# Altium PCB CreationByte_DevBoard_v1 PCB.PcbDoc (part 2 of 2)
Units mil, origin at the board's own origin, x right, y up, seen from the top; angles counter-clockwise.
Board outline 2480.32 x 787.4 mil, 2 copper layers (Top Layer, Bottom Layer), stack 38.583 mil thick; 69 components, 43 nets, 237 pads, 167 vias.
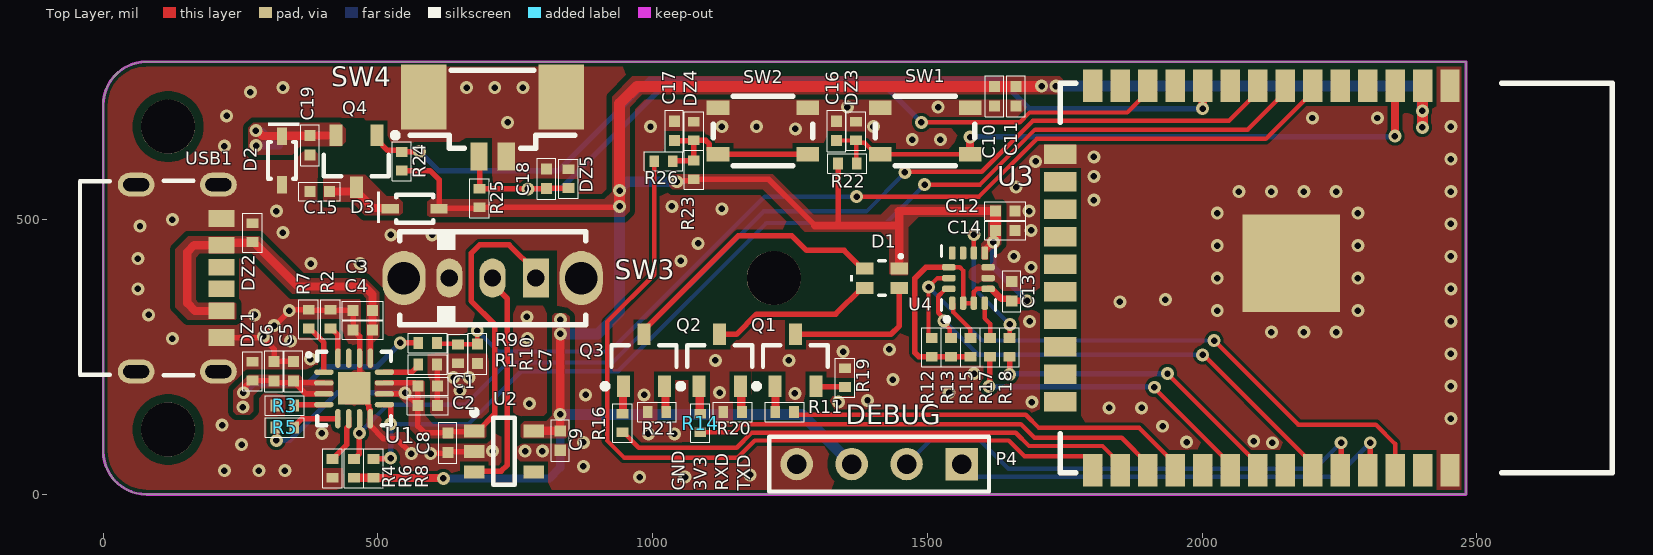
[diagram p0: Top Layer view]

## Part data (continued)
R26: library part RES_SMD, "RES SMD 33 OHM 1% 1/16W 0402", Case Code (Imperial)=0402, Case Code (Metric)=1005, Manufacturer 1=Yageo, Manufacturer Part Number 1=RC0402FR-0733RL, Max Operating Temperature=155°C, Max Power Dissipation=63mW, Min Operating Temperature=-55°C, Package Quantity=10000, Power Rating=62.5mW, Resistance Tolerance=1%, Resistor Type="Thick Film", Supplier Part Number 1=311-33.0LRCT-ND, Temperature Coefficient=100ppm/°C, Voltage Rating=50V, Case/Package=0402, Category="Chip SMD Resistors", ComponentLink1Description=https://datasheet.ciiva.com/11819/0900766b80c66297-11819487.pdf?src-supplier=RSComponents, ComponentLink1URL=https://datasheet.ciiva.com/11819/0900766b80c66297-11819487.pdf?src-supplier=RSComponents, ComponentLink2Description=https://datasheet.ciiva.com/15189/getdatasheetpartid-329253-15189431.pdf?src-supplier=Verical, ComponentLink2URL=https://datasheet.ciiva.com/15189/getdatasheetpartid-329253-15189431.pdf?src-supplier=Verical, ComponentLink3Description=https://datasheet.ciiva.com/24070/pyu-rc0402-51-rohs-l-6-r-8721-24070077.pdf?src-supplier=Mouser, ComponentLink3URL=https://datasheet.ciiva.com/24070/pyu-rc0402-51-rohs-l-6-r-8721-24070077.pdf?src-supplier=Mouser, ComponentLink4Description=https://datasheet.ciiva.com/7849/1018594-7849966.pdf?src-supplier=Element14, ComponentLink4URL=https://datasheet.ciiva.com/7849/1018594-7849966.pdf?src-supplier=Element14, ComponentLink5Description=https://datasheet.ciiva.com/7849/1018594-7849967.pdf?src-supplier=Element14, ComponentLink5URL=https://datasheet.ciiva.com/7849/1018594-7849967.pdf?src-supplier=Element14, ComponentLink6Description=https://datasheet.ciiva.com/17070/pyu-rc0402-51-rohs-l-6-r-17070335.pdf?src-supplier=Future+Electronics, ComponentLink6URL=https://datasheet.ciiva.com/17070/pyu-rc0402-51-rohs-l-6-r-17070335.pdf?src-supplier=Future+Electronics, Construction=Rectangular, Depth=0.5mm, Features="Moisture Resistant", Height=0.35mm, Lead Free="Lead Free", Length=1mm, Military Standard=Not, Mouting Technology=SMT, Number of Pins=2, Number of Terminations=2, Packaging="Tape and Reel", Pin=2, Pricing 1="1=0.10000, 10=0.01600, 100=0.00660, 1000=0.00299, 2500=0.00259, 5000=0.00214 (USD)", REACH SVHC=Unknown, Resistance=33R, RoHS=Yes, RoHS Compliant=Yes, Series=RC, Size Code=0402, Stock 1=1820701, Supplier 1=Digi-Key, Technology="THICK FILM", Termination=SMD/SMT, Tolerance=1%, Voltage Rating (DC)=50V, Width=0.5mm
SW1 SW2: library part A08-0790, "SWITCH TACTILE SPST-NO 0.05A 16V", Contact Rating @ Voltage="0.05A @ 16VDC", Illumination Type, Color=-, Manufacturer=C&K, Manufacturer Part Number="PTS810 SJK 250 SMTR LFS", Operating Force=260gf, Operating Temperature="-40°C ~ 85°C", Supplier Part Number 1=CKN10503CT-ND, Actuator Height off PCB, Vertical=2.50mm, Actuator Length, Right Angle=-, Actuator Material=-, Actuator Orientation="Top Actuated", Actuator Type=Standard, Category=Switches, Circuit=SPST-NO, ComponentLink1Description=https://www.ckswitches.com/media/1476/pts810.pdf, ComponentLink1URL=https://www.ckswitches.com/media/1476/pts810.pdf, Features=-, Illumination=Non-Illuminated, Illumination Voltage (Nominal)=-, Ingress Protection=-, Mechanical Life="50,000 Cycles", Mounting Type="Surface Mount", Outline="4.20mm x 3.20mm", Packaging="Cut Tape (CT)", Part Status=Active, Pricing 1="1=0.3, 10=0.287, 25=0.2768, 50=0.267, 100=0.2521, 250=0.23728, 500=0.2274, 1000=0.17302 (USD)", RoHS="RoHS Compliant", Stock 1=75516, Supplier 1=Digi-Key, Switch Function=Off-Mom, Switch Travel=0.15mm, Termination Style="J Lead"
SW3: library part JS202011JAQN, "Slide", Actuator Color=Black, Contact Current Rating=100mA, Contact Resistance=20mR, Insulation Resistance=100MR, Manufacturer 1="ITT C&K", Max Operating Temperature=70°C, Max Voltage Rating (DC)=12V, Min Operating Temperature=-30°C, Package Quantity=300, Supplier Part Number 1=CKN9565-ND, Actuator Length=4mm, Actuator Material=Polyoxymethylene,Acetal,Polyacetal, Actuator Type=Standard, Category="Slide Switches", ComponentLink1Description=https://datasheet.ciiva.com/30466/0900766b81263f61-30466806.pdf?src-supplier=RSComponents, ComponentLink1URL=https://datasheet.ciiva.com/30466/0900766b81263f61-30466806.pdf?src-supplier=RSComponents, ComponentLink2Description=https://datasheet.ciiva.com/16298/os102011ms2qn1-16298526.pdf?src-supplier=Future+Electronics, ComponentLink2URL=https://datasheet.ciiva.com/16298/os102011ms2qn1-16298526.pdf?src-supplier=Future+Electronics, ComponentLink3Description=https://datasheet.ciiva.com/2889/os-19jan15-2889173.pdf?src-supplier=Digi-Key, ComponentLink3URL=https://datasheet.ciiva.com/2889/os-19jan15-2889173.pdf?src-supplier=Digi-Key, ComponentLink4Description=https://datasheet.ciiva.com/1699/os-19jan15-1699479.pdf?src-supplier=Newark, ComponentLink4URL=https://datasheet.ciiva.com/1699/os-19jan15-1699479.pdf?src-supplier=Newark, ComponentLink5Description=https://datasheet.ciiva.com/18147/getdatasheetpartid-320490-18147210.pdf?src-supplier=Verical, ComponentLink5URL=https://datasheet.ciiva.com/18147/getdatasheetpartid-320490-18147210.pdf?src-supplier=Verical, ComponentLink6Description=https://datasheet.ciiva.com/16997/70128245-16997771.pdf?src-supplier=Allied+Electronics, ComponentLink6URL=https://datasheet.ciiva.com/16997/70128245-16997771.pdf?src-supplier=Allied+Electronics, ComponentLink7Description=https://datasheet.ciiva.com/26290/os-11mar13-26290652.pdf?src-supplier=Onlinecomponents.com, ComponentLink7URL=https://datasheet.ciiva.com/26290/os-11mar13-26290652.pdf?src-supplier=Onlinecomponents.com, ComponentLink8Description=https://datasheet.ciiva.com/1532/1683358-1532308.pdf?src-supplier=Element14, ComponentLink8URL=https://datasheet.ciiva.com/1532/1683358-1532308.pdf?src-supplier=Element14, Contact Material="Copper Alloy,Brass,Silver", Contact Plating=Silver,Gold, Contact Style=Non-Shorting, Current Rating=100mA, Depth=4.3mm, Electrical Life=10000Cycles, Housing Material=Resin, Lead Free="Lead Free", Length=8.6mm, Manufacturer Part Number 1=OS102011MS2QN1, Max Current Rating=100mA, Mechanical Life=10000Cycles, Mount="Through Hole,PCB", Orientation=Vertical, Packaging=Bulk, Pricing 1="1=0.51000, 10=0.49300, 25=0.47520, 100=0.41110, 250=0.37452, 500=0.34712, 1000=0.31059, 2500=0.29415, 5000=0.27222 (USD)", Radiation Hardening=No, REACH SVHC="No SVHC", RoHS=Yes, RoHS Compliant=Yes, Series=OS, Stock 1=34195, Supplier 1=Digi-Key, Switch Function=On-On, Switch Travel=2mm, Termination="PC Pins", Throw Configuration=SPDT, Voltage Rating (DC)=12V
U1: "IC BATT CHG LI-ION 1CELL 16QFN", Battery Pack Voltage=4.2V, Case/Package=VQFN, Manufacturer 1="Texas Instruments", Max Charge Current=1.5A, Max Operating Temperature=125°C, Max Supply Voltage=10.2V, Min Input Voltage=4.3V, Min Operating Temperature=-40°C, Min Supply Voltage=4.35V, Package Quantity=3000, Supplier Part Number 1=595-BQ24074RGTR, Battery Chemistry=LITHIUM-ION, Category="Battery Management", ComponentLink1Description=https://datasheet.ciiva.com/1932/bq24074-1932360.pdf?src-supplier=Digi-Key, ComponentLink1URL=https://datasheet.ciiva.com/1932/bq24074-1932360.pdf?src-supplier=Digi-Key, ComponentLink2Description=https://datasheet.ciiva.com/26811/getdatasheetpartid-357714-26811766.pdf?src-supplier=Verical, ComponentLink2URL=https://datasheet.ciiva.com/26811/getdatasheetpartid-357714-26811766.pdf?src-supplier=Verical, ComponentLink3Description=https://datasheet.ciiva.com/3214/bq24079-3214039.pdf?src-supplier=Avnet, ComponentLink3URL=https://datasheet.ciiva.com/3214/bq24079-3214039.pdf?src-supplier=Avnet, ComponentLink4Description=https://datasheet.ciiva.com/26109/bq24079-26109321.pdf?src-supplier=Avnet+Europe, ComponentLink4URL=https://datasheet.ciiva.com/26109/bq24079-26109321.pdf?src-supplier=Avnet+Europe, Contact Plating=Gold, Fault Protection="Over Voltage,Over Temperature,Short Circuit,Reverse Current", Interface=USB, Lead Free="Lead Free", Manufacturer Part Number 1=BQ24074RGTR, Number of Cells=1, Number of Pins=16, Output Current=1.5A, Output Voltage=4.2V, Packaging="Tape and Reel", Pricing 1="1=2.29000, 10=2.07000, 50=1.95000, 100=1.66000, 1000=1.13000, 10000=1.06000 (USD)", Radiation Hardening=No, RoHS=Yes, RoHS Compliant=Yes, Series=-, Stock 1=15, Supplier 1=Mouser, Weight=0.000808oz
U2: "IC REG LINEAR 3.3V 1A SOT25", Case/Package=SOT-25, Dropout Voltage=655mV, Manufacturer=Torex, Max Input Voltage=6V, Max Operating Temperature=85°C, Min Current Limit=1.005A, Min Input Voltage=1.6V, Min Operating Temperature=-40°C, Nominal Output Voltage=3.3V, Output Current=1A, Package Quantity=1, Supplier Part Number 1=893-1133-1-ND, ComponentLink1Description=https://datasheet.ciiva.com/2040/xc6220-2040200.pdf?src-supplier=Digi-Key, ComponentLink1URL=https://datasheet.ciiva.com/2040/xc6220-2040200.pdf?src-supplier=Digi-Key, ComponentLink2Description=https://datasheet.ciiva.com/2040/xc6220-2040201.pdf?src-supplier=Digi-Key, ComponentLink2URL=https://datasheet.ciiva.com/2040/xc6220-2040201.pdf?src-supplier=Digi-Key, ComponentLink3Description=https://datasheet.ciiva.com/2040/xc6220-2040202.pdf?src-supplier=Digi-Key, ComponentLink3URL=https://datasheet.ciiva.com/2040/xc6220-2040202.pdf?src-supplier=Digi-Key, ComponentLink4Description=https://datasheet.ciiva.com/7992/610888-7992813.pdf?src-supplier=Element14, ComponentLink4URL=https://datasheet.ciiva.com/7992/610888-7992813.pdf?src-supplier=Element14, ComponentLink5Description=https://datasheet.ciiva.com/5755/610888-5755886.pdf?src-supplier=Farnell, ComponentLink5URL=https://datasheet.ciiva.com/5755/610888-5755886.pdf?src-supplier=Farnell, Manufacturer Part Number=XC6220B331MR-G, Mount="Surface Mount", Number of Pins=5, Number of Regulators=1, Output Type=Fixed, Output Voltage=3.3V, Packaging="Tape and Reel", Pricing 1="1 = 0.91000, 10 = 0.81100, 25 = 0.77000, 100 = 0.59130, 250 = 0.52252, 500 = 0.49500, 1000 = 0.38500 (USD)", REACH SVHC="No SVHC", RoHS=Yes, Stock 1=13360, Supplier 1=Digi-Key
U3: library part ESP32-S, "RX TXRX MOD WIFI TRACE ANT SMD", Case/Package=SMD/SMT, Frequency=2.5GHz, Manufacturer="Espressif Systems", Max Operating Temperature=85°C, Min Operating Temperature=-40°C, Supplier Part Number 1=1904-1025-1-ND, ComponentLink1Description=https://www.espressif.com/sites/default/files/documentation/esp32-wroom-32d_esp32-wroom-32u_datasheet_en.pdf?src-supplier=Digi-Key, ComponentLink1URL=https://www.espressif.com/sites/default/files/documentation/esp32-wroom-32d_esp32-wroom-32u_datasheet_en.pdf?src-supplier=Digi-Key, Data Rate=150Mbps, Interface=I2C,SPI,GPIO,PWM,SDIO,UART, Manufacturer Part Number="ESP32-WROOM-32D (16MB)", Memory Size=536KB, Mount="Surface Mount", Packaging="Tape and Reel", Pricing 1="1 = 4.50000 (USD)", RoHS=No, Sensitivity=-98dBm, Stock 1=6133, Supplier 1=Digi-Key
U4: "IMU ACCEL/GYRO I2C/SPI 14LGA", Case/Package=LGA, Manufacturer 1=STMicroelectronics, Manufacturer Part Number 1=LSM6DSLTR, Max Operating Temperature=85°C, Min Operating Temperature=-40°C, Supplier Part Number 1=497-16705-1-ND, Category="Inertial Measurement Units (IMUs)", ComponentLink1Description=http://www.farnell.com/datasheets/2290668.pdf?src-supplier=Farnell, ComponentLink1URL=http://www.farnell.com/datasheets/2290668.pdf?src-supplier=Farnell, ComponentLink2Description=https://www.mouser.com/ds/2/389/lsm6dsl-973708.pdf?src-supplier=Mouser, ComponentLink2URL=https://www.mouser.com/ds/2/389/lsm6dsl-973708.pdf?src-supplier=Mouser, ComponentLink3Description=http://www.st.com/content/ccc/resource/technical/document/datasheet/ee/23/a0/dc/1d/68/45/52/DM00237456.pdf/files/DM00237456.pdf/jcr:content/translations/en.DM00237456.pdf?src-supplier=Digi-Key, ComponentLink3URL=http://www.st.com/content/ccc/resource/technical/document/datasheet/ee/23/a0/dc/1d/68/45/52/DM00237456.pdf/files/DM00237456.pdf/jcr:content/translations/en.DM00237456.pdf?src-supplier=Digi-Key, ComponentLink4Description=http://www.farnell.com/datasheets/2290668.pdf?src-supplier=Newark, ComponentLink4URL=http://www.farnell.com/datasheets/2290668.pdf?src-supplier=Newark, ComponentLink5Description=http://www.farnell.com/datasheets/2290668.pdf?src-supplier=Element14, ComponentLink5URL=http://www.farnell.com/datasheets/2290668.pdf?src-supplier=Element14, Mount="Surface Mount", Output Type=SPI,I2C, Packaging="Tape and Reel", Pricing 1="1=5.27000, 10=4.73000, 25=4.47200, 100=3.87560, 250=3.67688, 500=3.29924, 1000=3.28125 (USD)", RoHS=Yes, RoHS Compliant=Yes, Sensor Type="Accelerometer,Gyroscope,3 Axis,Temperature", Supplier 1=Digi-Key
USB1: "USB - Type C Female 6 USB Connectors RoHS", Manufacturer 1="Korean Hroparts Elec", Manufacturer Part Number 1=TYPE-C-31-M-17

## Free pads (board coordinates)
  round 98.43 hole 98.43: M1(118.11,669.29) M1(1220.47,393.7) M2(118.11,118.11)

## Via types
v1: diameter 23.62, hole 11.81, Top Layer to Bottom Layer, tented both sides, 167 vias

## Nets (pads, with @x,y where several pads share a name; then routed paths per layer and width w, separated by ;. In a path a pad name is that pad's centre, name@x,y a point inside that pad or via, vN(x,y) a via of type N, cw(c..) or ccw(c..) an arc to the next point about the centre after c; other vN are vias at no path point)
+3.3V: C9.2 C10.2 C11.2 C12.2 C13.2 C14.2 D1.1 D3.1 P4.3 R6.1 R8.1 R12.2 R13.2 R15.2 R22.2 R23.2 R24.2 R25.2 U2.5 U3.2 U4.2 U4.3 U4.5 U4.8 U4.12 | length 5585.4
  Top Layer w8: U4.12 1559.11,413.39 1564.96,407.54 U4.2 U4.3 1584.64,368.93 1589.73,374.02 U4.5
  Top Layer w10: R24.2 594.7,589.3 611.22,572.78 D3.1 612.56,521.03 683.7,521.03 R25.2 938.37,522.37 v1(940,524) ; v1(1044,569) 1046.28,571.28 1072.53,571.28 R23.2 1211.17,573.55 1275.59,509.13 1295.28,489.44 ; 1337.33,491 R22.2 ; U4.12 1497.1,413.39 1477,393.29 1477,258 1484.28,250.72 R12.2 R13.2 R15.2
  Top Layer w12: U4.8 1604.33,445.29 v1@1619.02,459.98 ; U4.5 1616.54,374.02 1634.16,356.4 1649.5,356.4 C13.2 v1(1681.64,352.36) ; v1@1619.98,460.94 1619.98,476.28 C14.2@1623.98,480.28
  Top Layer w15: R6.1 R8.1 492.75,29.62 618.38,29.62 v1(619,29) ; U2.5 C9.2 831.75,115.82 831.75,145.63 v1(831.69,145.69) ; v1@831.84,145.6 831.84,291.84 v1(832,292) ; 1295.28,489.44 1445.38,489.44 1448.82,486 ; D1.1 1448.82,486 ; C12.2 1447.65,515.75 1448.82,514.57 1448.82,486
  Top Layer w20: v1(940,524) v1(940,553) 940,711 971.13,742.13 C10.2 C11.2 1706.15,742.13 1707.02,743 v1(1708,743) ; v1(1620,459) 1620,459.98 1623.98,463.96 C14.2@1623.98,480.28 ; C12.2 C14.2 ; v1(2401,668) v1(2401,698) 2401.09,698.09 2401.09,743.82 2401,743.91 U3.2 ; C14.2@1623.98,480.28 C14.2
  Bottom Layer w12: v1(1620,459) 1620,414 v1(1681.64,352.36)
  Bottom Layer w15: v1(619,29) 812,29 831.69,48.69 v1(831.69,145.69)
  Bottom Layer w20: v1(831.69,145.69) 1271.63,145.69 P4.3 ; v1(832,292) 900,292 940,332 940,553.98 941.81,555.79 941.81,557.28 953.53,569 v1(1044,569) ; v1(1708,743) v1(1734,743) 2388.59,743 2400.31,731.28 2400.31,698.69 v1(2401,698)
  other v1: 832,318
+5V: C3.2 C4.2 DZ2.2 U1.13 USB1.A9 USB1.B9 | length 663.2
  Top Layer w10: U1.13 486.3,248.11 486.3,295.35 C4.2
  Top Layer w15: USB1.A9 167.14,333.86 153,348 153,441 165.54,453.54 USB1.B9 220.03,458.02 270.3,458.02 DZ2.2 273.62,459.38 354.5,378.5 475.5,378.5 490.16,363.84 C4.2
ACC_INT1: R17.1 U3.30 | length 565.6
  Top Layer w8: v1(1913,195) 1913,193.69 2051.18,55.51 U3.30
  Top Layer w10: v1(1612,196) 1613.09,197.09 1613.09,249.63 R17.1
  Bottom Layer w10: v1(1612,196) 1612.5,195.5 1912.5,195.5 v1(1913,195)
ACC_INT2: R18.1 U3.31 | length 564.4
  Top Layer w8: v1(1937,220) 1937,219.69 2101.18,55.51 U3.31
  Top Layer w10: v1(1649.61,218.61) R18.1
  Bottom Layer w10: v1(1649.61,218.61) 1650.3,219.3 1936.3,219.3 v1(1937,220)
ADC_VBAT: C7.2 R9.1 R10.2 U3.6 | length 1843.3
  Top Layer w8: R9.1 608.89,274.25 644.33,274.25 R10.2 646.03,273.26 680.74,273.26 680.92,273.44 680.92,298.08 v1(680.74,298.26) ; v1(1371,542) 1594,542 1699,647 2115.9,647 2201.18,732.28 U3.6
  Bottom Layer w8: v1(680.74,298.26) 719,260 922,260 1204,542 v1(1371,542)
CHARGE_PGOOD: R6.2 U1.7 U3.8 | length 1956.9
  Top Layer w8: v1(1459,586) 1460,587 1599,587 1692,680 2048.9,680 2101.18,732.28 U3.8
  Top Layer w10: R6.2 458.66,64.24 462.52,68.1 462.52,70.48 466,73.96 v1(466,111.32)
  Bottom Layer w8: v1(466,111.32) 517.54,162.86 658.86,162.86 736,240 927,240 1202,515 1389,515 1459,585 v1(1459,586)
CHARGE_STAT: R8.2 U1.9 U3.7 | length 2030.4
  Top Layer w8: v1(1495,563.81) 1595.81,563.81 1696,664 2082.9,664 2151.18,732.28 U3.7
  Top Layer w10: R8.2 493,65.12 522.12,65.12 v1(523,66) ; U1.9 522.92,163.39 523,163.31 v1(523,128)
  Bottom Layer w8: v1(523,128) 665,128 761,224 937,224 1207,494 1425.19,494 v1(1495,563.81)
  Bottom Layer w10: v1(523,66) v1(523,128)
ESP32_EN: C16.1 DZ3.2 R22.1 SW1.1 SW1.2 U3.3 | length 1193.8
  Top Layer w8: C16.1 1335,644.06 1369.72,644.06 DZ3.2 ; R22.1 1370.7,602.99 1370.7,643.79 DZ3.2 ; SW1.1 SW1.2 1406.5,619.09 1385.95,639.64 1374.86,639.64 DZ3.2
  Top Layer w15: SW1.1 v1(1577.76,650.24) ; v1(2351,652) 2351.09,652.09 2351.09,744 U3.3
  Bottom Layer w10: v1(1577.76,650.24) 1578.63,651.12 2350.12,651.12 v1(2351,652)
ESP32_IO0: R26.1 U3.25 | length 1483.1
  Top Layer w8: R26.1 1002.69,399.69 917,314 917,98 948,67 1154.8,67 1185.8,98 1648,98 1676.77,69.23 1787.46,69.23 1801.18,55.51 U3.25
ESP32_RXD0: P4.2 U3.34 | length 900.2
  Top Layer w10: U3.34 2253,45.52 v1(2253,94)
  Bottom Layer w8: P4.2 1505.09,98 1596,98 1647,47 2206,47 v1(2253,94)
ESP32_SCL: R12.1 U3.36 U4.13 | length 1154.7
  Top Layer w8: R12.1 1506.96,284.72 1502.1,289.57 v1(1502.1,377.39) 1518.41,393.7 U4.13 ; v1(2022,280) 2175,127 2316,127 2351.18,91.82 U3.36
  Bottom Layer w8: v1(1502.1,377.39) 1599.5,280 v1(2022,280)
ESP32_SDA: R13.1 U3.33 U4.14 | length 901.6
  Top Layer w8: U4.14 1537.07,372.11 1530.97,372.11 1519.65,360.8 1519.65,330.58 1530,320.23 v1(1530,316) 1530,311.77 1540.88,300.89 1540.88,287.14 R13.1 ; v1(2001,254) 2002.69,254 2201.18,55.51 U3.33
  Bottom Layer w8: v1(1530,316) 1592,254 v1(2001,254)
ESP32_TXD0: P4.1 U3.35 | length 833.9
  Top Layer w10: U3.35 2306,48.52 v1(2306,94)
  Bottom Layer w8: P4.1 1587.32,30 1587.32,31.59 1587.73,32 2244,32 v1(2306,94)
GND: C1.1 C2.1 C3.1 C4.1 C5.1 C6.1 C7.1 C8.1 C9.1 C10.1 C11.1 C12.1 C13.1 C14.1 C15.1 C16.2 C17.2 C18.2 C19.1 D2.1 DZ1.1 DZ2.1 DZ3.1 DZ4.1 DZ5.1 P1.0 P1.1 P4.4 P5.0 P5.1 R1.1 R2.1 R3.1 R4.1 R7.1 R10.1 R19.1 R20.1 R21.2 SW1.3 SW1.4 SW2.3 SW2.4 SW3.3 SW3.H1 SW3.H2 SW4.0 SW4.2 U1.8 U1.14 U1.17 U2.2 U3.0 U3.1 U3.15 U3.38 U4.6 U4.7 USB1.0 USB1.A12 USB1.B12 | length 823.1
  Top Layer w10: USB1.A12 v1@290.17,285.43 ; C5.1 C6.1 311.02,264.58 v1@290.17,285.43 ; U1.17 466.54,202.76 U1.14 466.54,287.4 C4.1 C3.1 454.1,335.27 374.64,335.27 R7.1 340.64,335.9 v1@290.17,285.43 ; U1.17@462.2,187.4 481.22,168.39 481.22,164.4 483.09,162.53 483.09,156.79 486.22,153.66 486.22,125.16 510.54,100.84 534.16,100.84 v1(561,74) ; v1(596,74) 597.19,75.19 625.89,75.19 628.07,77.37 674.33,77.37 U2.2 ; R1.1 607.91,235.86 607.91,197.21 C1.1 C2.1
  other v1: 976.38,31.5 1059.06,31.5 1177.17,35.43 220.47,43.31 283.46,43.31 330.71,43.31 874.02,51.18 708.66,78.74 767.72,78.74 799.21,78.74 251.97,90.55 874.02,94.49 2128,94 1972,95 2094,97 992.13,110.24 1039.37,110.24 398,111 1928,124 216.54,125.98 2452.76,137.8 1830.71,157.48 1889.76,157.48 775.59,165.35 1338,168 1690,168 1391,171 877.95,181.1 984.25,181.1 1259,184 1122.05,185.04 1539.37,185.04 649,189 2452.76,196.85 1437,209 637.8,212.6 665.35,212.6 1585,220 1114.17,244.09 1248.03,244.09 377,246 2452.76,255.91 1346.46,259.84 1431,264 341,279 125.98,283.46 772,284 291.34,287.4 2125.98,295.28 2185.04,295.28 2244.09,295.28 311.02,307.09 1686,315 2452.76,314.96 771,323 82.68,326.77 275.59,326.77 338.58,334.65 2027.56,334.65 2283.46,334.65 1850.39,350.39 1933.07,354.33 62.99,374.02 2452.76,374.02 2027.56,393.7 2283.46,393.7 1688.98,413.39 378,420 467,420 1051.18,425.2 62.99,429.13 1657.48,433.07 2452.76,433.07 2027.56,452.76 2283.46,452.76 1082.68,456.69 523.62,472.44 598.43,472.44 326.77,476.38 1688.98,480.32 66.93,488.19 2452.76,492.13 125.98,500 2027.56,511.81 2283.46,511.81 314.96,515.75 1685.04,515.75 1125.98,519.68 1035,524 1803.15,535.43 2066.93,551.18 2125.98,551.18 2185.04,551.18 2244.09,551.18 2452.76,551.18 1661.42,559.06 1803.15,578.74 1696.85,606.3 2452.76,610.24 1803.15,614.17 220.47,633.86 1472.44,645.67 1523.62,645.67 1259.84,665.35 996.06,669.29 1125.98,669.29 1188.98,669.29 1401.57,669.29 2452.76,669.29 736.22,677.17 2200.79,685.04 2318.9,685.04 224.41,688.98 1354.33,704.72 1519.68,704.72 267.72,732.28 326.77,740.16 661.42,740.16 712.6,740.16 763.78,740.16
LED_BLUE: R16.1 U3.26 | length 964.3
  Top Layer w8: R16.1 946.85,112.92 974.77,85 1153,85 1180,112 1661,112 1685,88 1818.69,88 1851.18,55.51 U3.26
LED_GREEN: R14.1 U3.27 | length 862.6
  Top Layer w8: R14.1 1147.92,112.92 1163,128 1670,128 1695,103 1853.69,103 1901.18,55.51 U3.27
LED_RED: R11.1 U3.28 | length 744.8
  Top Layer w8: R11.1 1261.76,145 1679,145 1703,121 1885.69,121 1951.18,55.51 U3.28
NetC15_2: C15.2 D3.2 Q4.3 | length 133.9
  Top Layer w15: C15.2 456.32,551.18 Q4.3@460.63,555.49 ; Q4.3 Q4.3@460.63,555.49 ; D3.2 521.28,521.04 490.77,521.04 460.63,551.18 Q4.3@460.63,555.49
NetC17_1: C17.1 DZ4.2 R23.1 R26.2 SW2.1 SW2.2 | length 334.8
  Top Layer w10: R26.2 1037.31,606.93 1074.18,606.93 R23.1 1074.8,643.7 1074.44,644.06 1039.73,644.06 C17.1 ; DZ4.2 1096.39,644.42 1103.43,637.39 1103.43,626.89 1111.22,619.09 SW2.2 SW2.1
NetC19_2: C19.2 D2.2 P5.2 Q4.2 | length 246.1
  Top Layer w15: v1(278,662) 280.33,662 290.29,652.05 D2.2 325.82,652.54 376.02,652.54 C19.2 376.77,653.29 422.97,653.29 Q4.2
  Bottom Layer w15: v1(278,662) 279.65,660.35 288.44,660.35 303.47,645.33 303.47,643.09 311.72,634.84 P5.2 v1(278.16,634.84)
NetD1_2: D1.2 Q1.3 | length 264.6
  Top Layer w10: Q1.3 1433.34,291.34 1448.82,306.82 D1.2
NetD1_3: D1.3 Q2.3 | length 298.8
  Top Layer w10: Q2.3 1152.26,291.34 1189,328.08 1333,328.08 1380.91,375.98 D1.3
NetD1_4: D1.4 Q3.3 | length 505.3
  Top Layer w10: Q3.3 984.25,299.21 1156.04,471 1253,471 1280,444 1348.32,444 1380.91,411.42 D1.4
NetQ1_1: Q1.1 R11.2 | length 50.7
  Top Layer w15: Q1.1 1223.43,195.87 1223.43,147.91 R11.2@1224.41,146.92
NetQ1_2: Q1.2 R19.2 | length 53.7
  Top Layer w10: Q1.2 1298.5,195.6 R19.2
NetQ2_1: Q2.1 R14.2 | length 50.7
  Top Layer w15: Q2.1 1085.63,195.87 1085.63,147.91 R14.2
NetQ2_2: Q2.2 R20.2 | length 48.6
  Top Layer w15: Q2.2 1161.31,194.99 1161.31,150.96 R20.2
NetQ3_1: Q3.1 R16.2 | length 50.7
  Top Layer w15: R16.2 945.87,147.91 945.87,195.87 Q3.1
NetQ3_2: Q3.2 R21.1 | length 48.6
  Top Layer w15: Q3.2 1023.52,194.99 1023.52,150.96 R21.1
NetR1_2: R1.2 U1.12 | length 68.6
  Top Layer w10: U1.12 561.74,222.44 573.55,234.25 R1.2
NetR2_2: R2.2 U1.16 | length 60.7
  Top Layer w10: R2.2 415.35,301.9 427.17,290.09 U1.16
NetR3_2: R3.2 U1.4 | length 54.7
  Top Layer w10: R3.2 349.6,163.31 401.5,163.31 U1.4
NetR4_2: R4.2 U1.6 | length 86.9
  Top Layer w10: R4.2 419.29,64.24 423.15,68.1 423.15,70.07 443.19,90.11 443.19,120.76 446.85,124.43 U1.6
NetR5_2: R5.2 U1.5 | length 87.1
  Top Layer w10: R5.2 347.71,124.02 361.49,137.8 U1.5
NetR7_2: R7.2 U1.1 | length 92
  Top Layer w10: R7.2 375.98,301.9 401.57,276.31 U1.1
NetR15_1: R15.1 U4.1 | length 77.2
  Top Layer w8: U4.1 1547.18,346.13 1547.18,331.82 1578.11,300.89 1578.11,285.35 R15.1
NetR17_2: R17.2 U4.4 | length 67.4
  Top Layer w8: U4.4 1604.33,320.31 1614.17,310.47 R17.2
NetR18_2: R18.2 U4.9 | length 249.1
  Top Layer w8: U4.9 v1(1584.64,472.93) ; R18.2 1649.85,284.96 1649.85,309.15 v1(1650.1,309.39)
  Bottom Layer w8: v1(1584.64,472.93) 1584.64,374.85 v1(1650.1,309.39)
NetSW3_2: SW3.2 U2.3 | length 416.6
  Top Layer w10: U2.3 676.52,42.16 724.16,42.16 735.41,53.41 735.41,356.05 708.66,382.8 SW3.2
PWM_VIB: Q4.1 R24.1 U3.10 | length 1668.6
  Top Layer w10: Q4.1 498.03,645.67 517.48,626.22 540.39,626.22 R24.1 543.66,623.65 575.65,623.65 v1(576,624)
  Top Layer w15: v1(2001,702) 2001.09,702.09 2001.09,744 U3.10
  Bottom Layer w10: v1(576,624) 611,589 828,589 995,756 1631,756 1685,702 v1(2001,702)
USER_BTN: C18.1 DZ5.2 R25.1 SW4.1 U3.12 | length 1481.6
  Top Layer w8: v1(1489,677) 1668,677 1686,695 1863.9,695 1901.18,732.28 U3.12
  Top Layer w10: SW4.1 685.04,614.17 R25.1 798.5,556.37 C18.1@803.15,561.02 ; C18.1 807.44,557.44 846.1,557.44 DZ5.2
  Bottom Layer w10: v1(773,556) 832,556 1013,737 1429,737 v1(1489,677)
VBAT: C5.2 C6.2 DZ1.2 P1.2 R9.2 U1.2 U1.3 | length 571.1
  Top Layer w10: v1(255,185) 257.61,187.61 257.61,195.33 DZ1.2@265.83,203.55 ; DZ1.2 272.01,207.05 310.67,207.05 C6.2 314.88,202.83 C5.2@350.32,202.83 ; U1.3 368.86,183.07 351.5,200.43 351.5,201.65 C5.2@350.32,202.83 ; U1.2 401.5,202.83 C5.2@350.32,202.83 ; v1(540.59,275.59) R9.2
  Bottom Layer w10: v1(255,185) 258.69,185 275.46,201.77 P1.2 372.91,201.77 403.14,232 497,232 v1(540.59,275.59)
  other v1: 254,159
VCHARGE_OUT: C1.2 C2.2 C8.2 R5.1 SW3.1 U1.10 U1.11 U2.1 | length 1125.1
  Top Layer w10: R5.1 314.33,121.42 314.33,99.05 v1(314.96,98.43) ; U1.10 v1@549.47,183.07 ; U1.11 566.93,202.76 C1.2 C2.2 ; v1@551.18,183.07 C2.2 ; U2.1 682.2,115.76 712.6,146.15 712.6,309.4 669.71,352.29 669.71,438.71 685,454 738.91,454 787.4,405.51 SW3.1 ; U2.1@676,116.44 673.35,113.79 629.06,113.79 C8.2 585.18,111.82 572.83,124.17 C2.2
  Bottom Layer w10: v1(314.96,98.43) 315.31,98.77 339.77,98.77 425.67,184.67 v1(549.47,184.67)
pads on no net: U1.15 U2.4 U3.4 U3.5 U3.9 U3.11 U3.13 U3.14 U3.16 U3.17 U3.18 U3.19 U3.20 U3.21 U3.22 U3.23 U3.24 U3.29 U3.32 U3.37 U4.10 U4.11 USB1.A5

## Polygon pours and split planes (outlines as drawn)
GND on Top Layer "GND_TOP" (solid, remove dead copper, pour order 25): 0.31,-0.28 0.31,787.12 2480.63,787.12 2480.63,-0.28
NetC19_2 on Top Layer "NetC19_2" (solid, remove dead copper, pour order 22): 441.09,665.5 430.58,676 273,676 264,667 264,628 274,618 344,618 359,634 433.21,634 441.09,641.87
NetC15_2 on Top Layer "NetC15_2" (solid, remove dead copper, pour order 21): 515.78,543 476.78,582 408,582 400,574 400,536.22 403.94,532.28 452,532.28 476.28,508 540,508 545,513 545,532 534,543
+3.3V on Top Layer "+3.3V" (solid, remove dead copper, pour order 20): 1260,495 1277,478 1415,478 1431,462 1431,402 1434,399 1463,399 1465,401 1465,486 1484,505 1602,505 1611,496 1611,469 1598,456 1598,430 1601,427 1610,427 1611,428 1611,440 1618,447 1626,447 1634,455 1634,527 1433,527 1415,509 1293,509 1219,583 1036,583 1030,577 1030,561 1036,555 1200,555
+3.3V on Top Layer "+3.3V" (solid, remove dead copper, pour order 18): 958,515 948,505 593,505 590,508 590,534 593,537 912,537 926,551 926,565 926,724 963,761 1741,761 1746,756 1746,733 1741,728 981,728 958,705
+3.3V on Top Layer "+3.3V" (solid, remove dead copper, pour order 16): 842,102 849,109 849,323 842,330 822,330 817,325 817,144 806,133 766,133 760,127 760,105 763,102
VCHARGE_OUT on Top Layer "VCHARGE_OUT" (solid, remove dead copper, pour order 15): 495,178 537,178 556,159 556,121 575,102 694,102 697,105 697,125 694,128 601,128 585,144 585,205 582,208 495,208 494,207 494,179
VBAT on Top Layer "VBAT" (solid, remove dead copper, pour order 14): 273.5,179.5 273.5,151.5 267,145 242,145 237,150 237,189.76 265.24,218 357,218 366,209 417,209 419,207 419,180 417,178 367,178 352,193 287,193
+5V on Top Layer "+5V" (solid, remove dead copper, pour order 0): 240,318 242,320 242,347 240,349 173,349 168,354 168,431 176,439 270,439 344,365 471,365 479,357 479,235 484,230 489,230 491,232 491,276 502,287 502,368 477,393 361,393 284,470 155,470 131,446 131,341 154,318
NetC19_2 on Bottom Layer "NetC19_2" (solid, remove dead copper, pour order 17): 274,618 264,628 264,667 273,676 342,676 349,669 349,623 344,618
VBAT on Bottom Layer "VBAT" (solid, remove dead copper, pour order 19): 242,145 237,150 237,188 267,218 345.03,218 348,215.03 348,188 346,186 280,186 273,179 273,151 267,145
GND on Bottom Layer "GND_BOT" (solid, remove dead copper, pour order 28): 0.31,-0.28 0.31,787.12 2480.63,787.12 2480.63,-0.28
+3.3V on Bottom Layer "+3.3V" (solid, remove dead copper, pour order 27): 2378,728 2385,721 2385,660 2391,654 2410,654 2417,661 2417,741 2397,761 1695,761 1691,757 1691,735 1698,728
+3.3V on Bottom Layer "+3.3V" (solid, remove dead copper, pour order 26): 962.34,583 938,583 926,571 926,348 909,331 823,331 817,325 817,283 823,277 913,277 958,322 958,550 963,555 1056,555 1059,558 1059,579 1055,583

## Keep-outs
Keep-Out Layer:
  the board outline again, w5

## Other copper
Top Layer:
  pour cut-out: 653.37,641.81 572.46,641.81 580.27,634 645.56,634
  pour cut-out: 390.58,577.9 390.58,620.42 387,624 394,624 397,621 397,584.32
  pour cut-out: 593,494.8 547.68,494.8 543.9,498.58 589.22,498.58
  pour cut-out: 478.22,681.23 474.03,685.42 434.48,685.42 450.51,669.4 450.51,637.97 438.39,625.86 478.22,625.86
  pour cut-out: 1102.24,263.65 1004.06,263.65 1004.06,276 1102.24,276
  pour cut-out: 1394,338.71 1394,430.24 1370.2,430.24 1370.2,338.71
  pour cut-out: 1179.26,224.54 1205.58,224.54 1205.58,98.51 1145.81,98.51 1145.81,130.78 1179.53,130.78
  pour cut-out: 1041.46,224.54 1064.83,224.54 1064.83,207.32 1041.46,207.32
Bottom Layer:
  pour cut-out: 968,343 1021,343 1022,342 1015,335 984,335

## Silkscreen, mask and mechanical layers (free items; w line width, h text height)
Top Overlay:
  text "DEBUG" at 1351,116 h60
  text "GND" at 1067,7 h40 r90
  text "3V3" at 1106.32,7 h40 r90
  text "RXD" at 1146.16,7 h40 r90
  text "TXD" at 1186,7 h40 r90
Bottom Overlay:
  text "+" at 284,615 h60
  text "-" at 278,576 h60
  text "VIB" at 339,467 h60
  text "+" at 282,181 h60
  text "-" at 276,139 h60
  text "BAT" at 336,33 h55
Mechanical 1:
  the board outline again, w5